# Altium PCB ATMEGA128转换座.PCBDOC
Units mm, origin at the board's own origin, x right, y up, seen from the top; angles counter-clockwise.
Board outline 152.4 x 101.6 mm, 2 copper layers (Top Layer, Bottom Layer); 5 components, 61 nets, 132 pads, 0 vias.
Unrouted connection lines stored in the file: 3.
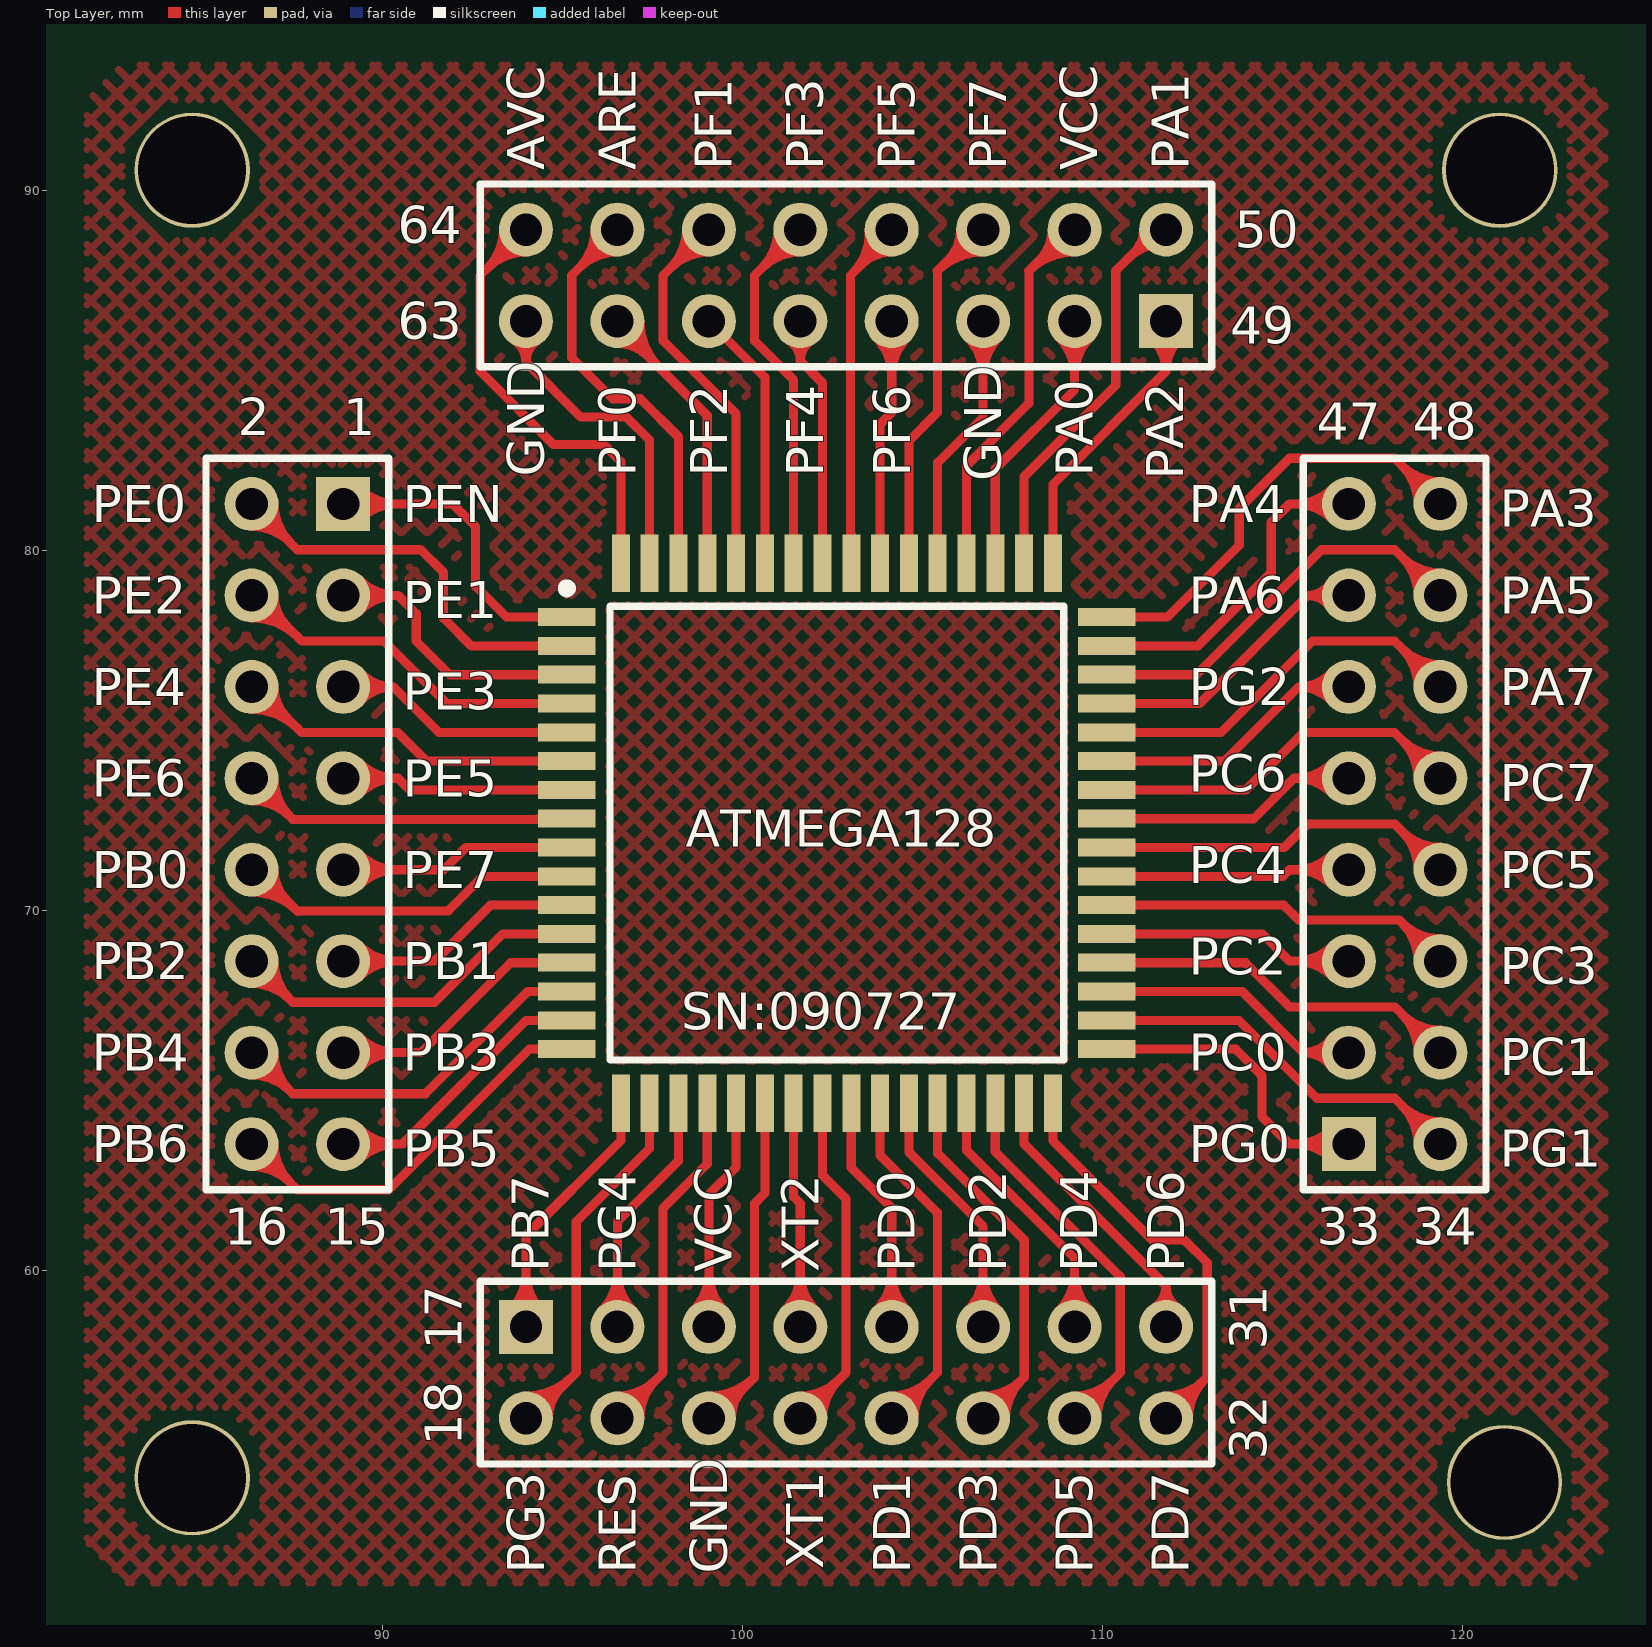
[diagram p0: Top Layer view]
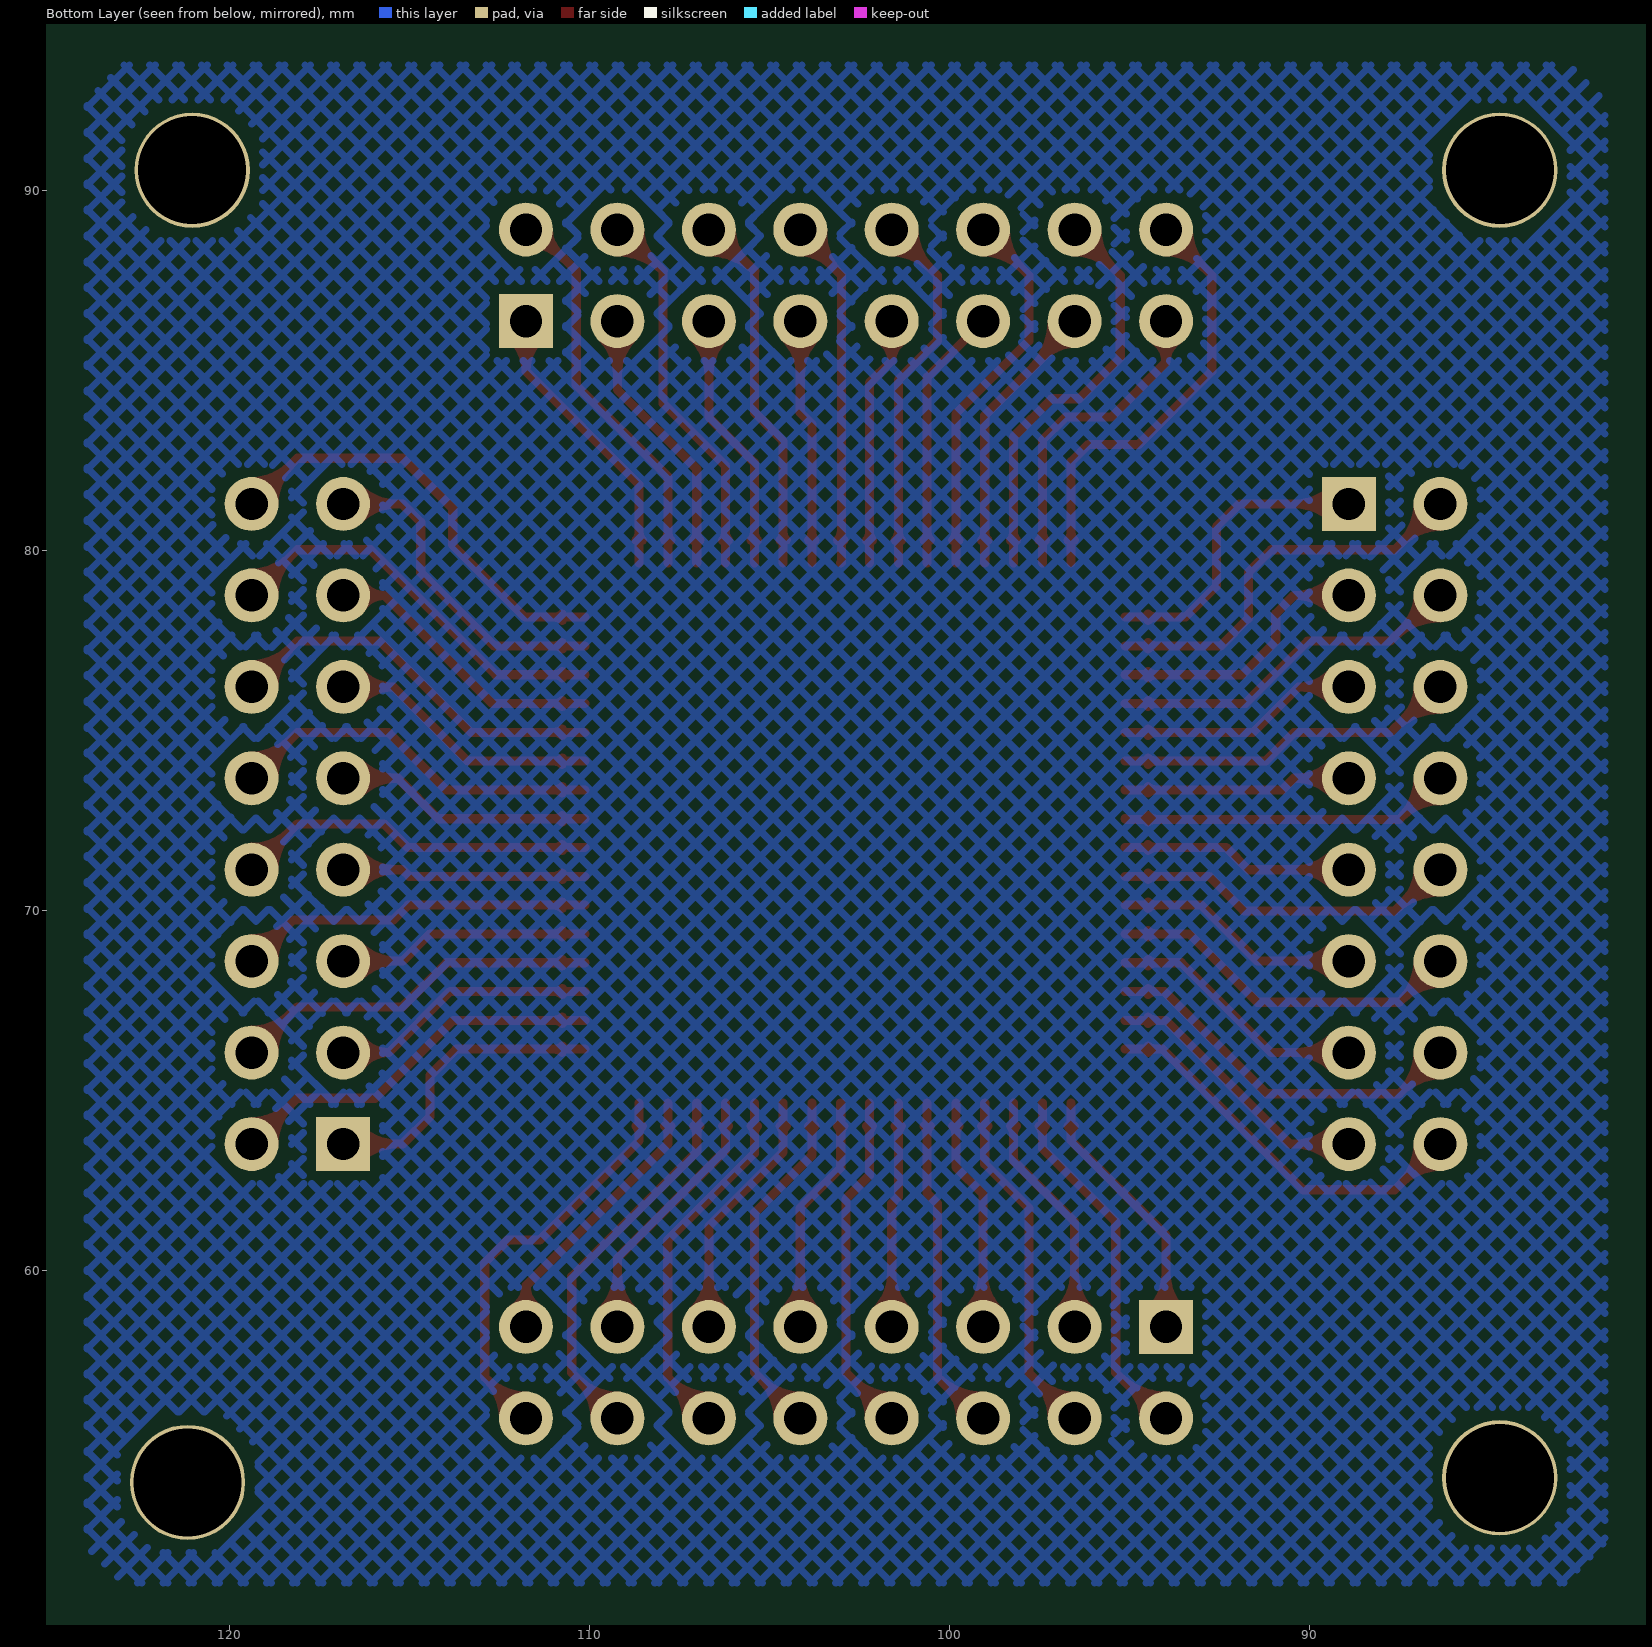
[diagram p1: Bottom Layer view, seen from below]

## Layer stack, top to bottom
Top Layer: signal copper 0.0356
Dielectric: dielectric 0.32, FR-4, Dk 4.8
Bottom Layer: signal copper 0.0356

## Board outline
25.4,25.4 177.8,25.4 177.8,127 25.4,127

## Design rules (kind name [scope] priority, off if disabled: settings)
Clearance [All] p1: gap=0.254
ComponentClearance [All] p1: gap=0.254 collisioncheckmode=3 verticalgap=0.254
PolygonConnect [All] p1: connectstyle=Relief reliefconductorwidth=0.254 reliefentries=4 polygonreliefangle="90 Angle"
RoutingVias [All] p1: holewidth=0.711 width=1.27 viastyle="Through Hole" minholewidth=0.711 minwidth=1.27 maxholewidth=0.711 maxwidth=1.27
SolderMaskExpansion [All] p1: expansion=0.102
TestPointUsage [All] p1: valid=0 allowmultiple=FALSE
Testpoint [All] p1: side=15 testpointundercomponent=TRUE minsize=1.016 maxsize=2.54 preferedsize=1.524 minholesize=0 maxholesize=1.016 preferedholesize=0.813 testpointgrid=0.025 style=1023 order=0123456789
Width [All] p1: maxlimit=0.254 minlimit=0.254 preferedwidth=0.254
17 further rules are at their usual default settings.

## Components (designator, comment, footprint, x,y, rotation, side; value= is the part's Value field where it differs from the comment)
ATMEGA128 "ATmega128-16AI" 64A 102.616,72.136 r0 top (schematic designator U1)
P1 "Header 8X2" HDR2X8 88.9,81.28 r270 top
P2 "Header 8X2" HDR2X8 93.98,58.42 r0 top
P3 "Header 8X2" HDR2X8 116.84,63.5 r90 top
P4 "Header 8X2" HDR2X8 111.76,86.36 r180 top

## Footprints (in the part's own frame and the unit in brackets; to place one, negate y for a bottom-side part, rotate by r counter-clockwise, add the part's x,y. Pads: shape width x height; smd on the part's side, far side on the other; paste and mask are expansions set on the pad)
64A [mm] "QFP; 64 Leads; Body 14 x 14 mm; Pitch 0.8 mm"
  rect 1.6x0.5 smd: 1(-7.5,6) 2(-7.5,5.2) 3(-7.5,4.4) 4(-7.5,3.6) 5(-7.5,2.8) 6(-7.5,2) 7(-7.5,1.2) 8(-7.5,0.4) 9(-7.5,-0.4) 10(-7.5,-1.2) 11(-7.5,-2) 12(-7.5,-2.8) 13(-7.5,-3.6) 14(-7.5,-4.4) 15(-7.5,-5.2) 16(-7.5,-6) 33(7.5,-6) 34(7.5,-5.2) 35(7.5,-4.4) 36(7.5,-3.6) 37(7.5,-2.8) 38(7.5,-2) 39(7.5,-1.2) 40(7.5,-0.4) 41(7.5,0.4) 42(7.5,1.2) 43(7.5,2) 44(7.5,2.8) 45(7.5,3.6) 46(7.5,4.4) 47(7.5,5.2) 48(7.5,6)
  rect 0.5x1.6 smd: 17(-6,-7.5) 18(-5.2,-7.5) 19(-4.4,-7.5) 20(-3.6,-7.5) 21(-2.8,-7.5) 22(-2,-7.5) 23(-1.2,-7.5) 24(-0.4,-7.5) 25(0.4,-7.5) 26(1.2,-7.5) 27(2,-7.5) 28(2.8,-7.5) 29(3.6,-7.5) 30(4.4,-7.5) 31(5.2,-7.5) 32(6,-7.5) 49(6,7.5) 50(5.2,7.5) 51(4.4,7.5) 52(3.6,7.5) 53(2.8,7.5) 54(2,7.5) 55(1.2,7.5) 56(0.4,7.5) 57(-0.4,7.5) 58(-1.2,7.5) 59(-2,7.5) 60(-2.8,7.5) 61(-3.6,7.5) 62(-4.4,7.5) 63(-5.2,7.5) 64(-6,7.5)
  silkscreen extent -7.62,-6.3 6.3,6.92
HDR2X8 [mm] "Connector; Header; 8x2 Position"
  rect 1.5x1.5 hole 0.9: 1(0,0)
  round 1.5 hole 0.9: 2(0,-2.54) 3(2.54,0) 4(2.54,-2.54) 5(5.08,0) 6(5.08,-2.54) 7(7.62,0) 8(7.62,-2.54) 9(10.16,0) 10(10.16,-2.54) 11(12.7,0) 12(12.7,-2.54) 13(15.24,0) 14(15.24,-2.54) 15(17.78,0) 16(17.78,-2.54)
  silkscreen extent -1.27,-3.81 19.05,1.27

## Part data
ATMEGA128: "8-Bit AVR Microcontroller with 128K Bytes of In-System Programmable Flash Memory"
P1 P2 P3 P4: "Header, 8-Pin, Dual row"

## Free pads (board coordinates)
  round 3.2 hole 3: 0(84.709,90.551) 1(121.031,90.551) 2(121.158,54.102) 3(84.709,54.229)

## Nets (pads, with @x,y where several pads share a name; then routed paths per layer and width w, separated by ;. In a path a pad name is that pad's centre, name@x,y a point inside that pad or via, vN(x,y) a via of type N, cw(c..) or ccw(c..) an arc to the next point about the centre after c; other vN are vias at no path point)
AREF: ATMEGA128.62 P4.14 | length 15.7
  Top Layer w0.254: P4.14@95.897,88.9 cw(c94.393,88.9) 95.456,87.836 cw(c96.52,86.773) P4.14@96.52,88.277 ; P4.14@96.151,88.9 cw(c95.26,88.9) 95.89,88.27 cw(c96.52,87.64) P4.14@96.52,88.531 ; P4.14 95.25,87.63 95.25,85.344 96.393,84.201 97.155,84.201 98.216,83.14 ATMEGA128.62 ; ATMEGA128.62@98.129,80.273 ccw(c97.919,80.483) 98.216,80.483 ccw(c98.513,80.483) ATMEGA128.62@98.303,80.273
AVCC: ATMEGA128.64 P4.16 | length 16.5
  Top Layer w0.254: P4.16@93.357,88.9 cw(c91.853,88.9) 92.916,87.836 cw(c93.98,86.773) P4.16@93.98,88.277 ; P4.16@93.611,88.9 cw(c92.72,88.9) 93.35,88.27 cw(c93.98,87.64) P4.16@93.98,88.531 ; P4.16 92.71,87.63 92.71,84.963 94.742,82.931 96.139,82.931 96.616,82.454 ATMEGA128.64 ; ATMEGA128.64@96.529,80.273 ccw(c96.319,80.483) 96.616,80.483 ccw(c96.913,80.483) ATMEGA128.64@96.703,80.273
GND: ATMEGA128.22 ATMEGA128.53 ATMEGA128.63 P2.6 P4.5 P4.15 | length 35.5
  Top Layer w0.254: P4.15@93.642,85.836 cw(c93.243,85.217) 93.98,85.217 ; P4.15 93.98,85.217 ; P4.15@94.318,85.836 ccw(c94.717,85.217) 93.98,85.217 ; ATMEGA128.63@97.329,80.273 ccw(c97.119,80.483) 97.416,80.483 ccw(c97.713,80.483) ATMEGA128.63@97.503,80.273 ; ATMEGA128.63 97.416,83.051 96.774,83.693 95.504,83.693 93.98,85.217 ; P2.6 99.187,55.88 100.33,57.023 ; P2.6@99.062,56.249 ccw(c99.069,57.424) 99.9,56.593 ; P2.6@99.064,56.503 ccw(c99.075,58.278) 100.33,57.023 ; P2.6@99.683,55.88 cw(c100.88,55.88) 100.034,56.727 ; ATMEGA128.22@100.529,63.999 cw(c100.319,63.789) 100.616,63.789 cw(c100.913,63.789) ATMEGA128.22@100.703,63.999 ; ATMEGA128.22 100.616,62.135 100.33,61.849 100.33,57.023 ; ATMEGA128.53@105.329,80.273 ccw(c105.119,80.483) 105.416,80.483 ccw(c105.713,80.483) ATMEGA128.53@105.503,80.273 ; ATMEGA128.53 105.416,82.429 106.68,83.693 P4.5 ; P4.5@106.239,85.919 cw(c105.176,84.856) 106.68,84.856 cw(c108.184,84.856) P4.5@107.121,85.919 ; P4.5@106.419,86.099 cw(c105.789,85.469) 106.68,85.469 cw(c107.571,85.469) P4.5@106.941,86.099
PA0: ATMEGA128.51 P4.3 | length 11.9
  Top Layer w0.254: ATMEGA128.51@106.929,80.273 ccw(c106.719,80.483) 107.016,80.483 ccw(c107.313,80.483) ATMEGA128.51@107.103,80.273 ; ATMEGA128.51 107.016,82.251 109.22,84.455 P4.3 ; P4.3@108.779,85.919 cw(c107.716,84.856) 109.22,84.856 cw(c110.724,84.856) P4.3@109.661,85.919 ; P4.3@108.959,86.099 cw(c108.329,85.469) 109.22,85.469 cw(c110.111,85.469) P4.3@109.481,86.099
PA1: ATMEGA128.50 P4.2 | length 13.4
  Top Layer w0.254: ATMEGA128.50@107.729,80.273 ccw(c107.519,80.483) 107.816,80.483 ccw(c108.113,80.483) ATMEGA128.50@107.903,80.273 ; ATMEGA128.50 107.816,82.035 110.363,84.582 110.363,87.757 111.506,88.9 P4.2 ; 110.696,88.09 cw(c111.76,87.027) P4.2@111.76,88.531 ; 110.876,88.27 ccw(c110.246,88.9) P4.2@111.137,88.9
PA2: ATMEGA128.49 P4.1 | length 11.8
  Top Layer w0.254: ATMEGA128.49@108.529,80.273 ccw(c108.319,80.483) 108.616,80.483 ccw(c108.913,80.483) ATMEGA128.49@108.703,80.273 ; ATMEGA128.49 108.616,81.819 111.76,84.963 ; P4.1@111.344,85.896 cw(c110.505,84.963) 111.76,84.963 ; P4.1@111.513,86.085 cw(c111.017,85.533) 111.76,85.533 cw(c112.503,85.533) P4.1@112.007,86.085 ; P4.1 111.76,84.963 ; P4.1@112.176,85.896 ccw(c113.015,84.963) 111.76,84.963
PA3: ATMEGA128.48 P3.16 | length 16.4
  Top Layer w0.254: ATMEGA128.48 111.791,78.136 113.792,80.137 113.792,81.153 115.189,82.55 118.11,82.55 P3.16 ; ATMEGA128.48@110.753,78.049 cw(c110.963,77.839) 110.963,78.136 cw(c110.963,78.433) ATMEGA128.48@110.753,78.223 ; P3.16@118.757,81.28 ccw(c117.253,81.28) 118.316,82.344 ccw(c119.38,83.407) P3.16@119.38,81.903 ; P3.16@119.011,81.28 ccw(c118.12,81.28) 118.75,81.91 ccw(c119.38,82.54) P3.16@119.38,81.649
PA4: ATMEGA128.47 P3.15 | length 13.4
  Top Layer w0.254: ATMEGA128.47 112.642,77.336 114.681,79.375 114.681,80.772 115.189,81.28 P3.15 ; ATMEGA128.47@110.753,77.249 cw(c110.963,77.039) 110.963,77.336 cw(c110.963,77.633) ATMEGA128.47@110.753,77.423 ; P3.15@116.399,80.839 ccw(c115.336,79.776) 115.336,81.28 ccw(c115.336,82.784) P3.15@116.399,81.721 ; P3.15@116.579,81.019 ccw(c115.949,80.389) 115.949,81.28 ccw(c115.949,82.171) P3.15@116.579,81.541
PA5: ATMEGA128.46 P3.14 | length 15.5
  Top Layer w0.254: ATMEGA128.46 112.604,76.536 116.078,80.01 118.11,80.01 P3.14 ; ATMEGA128.46@110.753,76.449 cw(c110.963,76.239) 110.963,76.536 cw(c110.963,76.833) ATMEGA128.46@110.753,76.623 ; P3.14@118.757,78.74 ccw(c117.253,78.74) 118.316,79.804 ccw(c119.38,80.867) P3.14@119.38,79.363 ; P3.14@119.011,78.74 ccw(c118.12,78.74) 118.75,79.37 ccw(c119.38,80) P3.14@119.38,79.109
PA6: ATMEGA128.45 P3.13 | length 9.9
  Top Layer w0.254: ATMEGA128.45 112.693,75.736 115.697,78.74 ; ATMEGA128.45@110.753,75.649 cw(c110.963,75.439) 110.963,75.736 cw(c110.963,76.033) ATMEGA128.45@110.753,75.823 ; P3.13@116.316,78.402 ccw(c115.697,78.003) 115.697,78.74 ; P3.13@116.316,79.078 cw(c115.697,79.477) 115.697,78.74 ; P3.13 115.697,78.74
PA7: ATMEGA128.44 P3.12 | length 15.1
  Top Layer w0.254: ATMEGA128.44 113.29,74.936 115.824,77.47 118.11,77.47 P3.12 ; ATMEGA128.44@110.753,74.849 cw(c110.963,74.639) 110.963,74.936 cw(c110.963,75.233) ATMEGA128.44@110.753,75.023 ; P3.12@118.757,76.2 ccw(c117.253,76.2) 118.316,77.264 ccw(c119.38,78.327) P3.12@119.38,76.823 ; P3.12@119.011,76.2 ccw(c118.12,76.2) 118.75,76.83 ccw(c119.38,77.46) P3.12@119.38,76.569
PB0: ATMEGA128.10 P1.10 | length 13.4
  Top Layer w0.254: P1.10@86.36,70.497 cw(c86.36,68.686) 87.64,69.967 ; P1.10@86.36,70.751 cw(c86.36,69.554) 87.207,70.4 ; P1.10 86.487,71.12 87.63,69.977 91.821,69.977 92.78,70.936 ATMEGA128.10 ; P1.10@86.983,71.12 ccw(c88.18,71.12) 87.334,70.273 ; ATMEGA128.10@94.479,70.849 ccw(c94.269,70.639) 94.269,70.936 ccw(c94.269,71.233) ATMEGA128.10@94.479,71.023
PB1: ATMEGA128.11 P1.11 | length 11.1
  Top Layer w0.254: P1.11 91.44,68.58 92.996,70.136 ATMEGA128.11 ; P1.11@89.161,68.319 cw(c89.791,67.689) 89.791,68.58 cw(c89.791,69.471) P1.11@89.161,68.841 ; P1.11@89.341,68.139 cw(c90.404,67.076) 90.404,68.58 cw(c90.404,70.084) P1.11@89.341,69.021 ; ATMEGA128.11@94.479,70.049 ccw(c94.269,69.839) 94.269,70.136 ccw(c94.269,70.433) ATMEGA128.11@94.479,70.223
PB2: ATMEGA128.12 P1.12 | length 14.2
  Top Layer w0.254: P1.12@86.36,67.957 cw(c86.36,66.453) 87.424,67.516 cw(c88.487,68.58) P1.12@86.983,68.58 ; P1.12@86.36,68.211 cw(c86.36,67.32) 86.99,67.95 cw(c87.62,68.58) P1.12@86.729,68.58 ; P1.12 87.503,67.437 91.44,67.437 93.339,69.336 ATMEGA128.12 ; ATMEGA128.12@94.479,69.249 ccw(c94.269,69.039) 94.269,69.336 ccw(c94.269,69.633) ATMEGA128.12@94.479,69.423
PB3: ATMEGA128.13 P1.13 | length 11.5
  Top Layer w0.254: P1.13 91.059,66.04 93.555,68.536 ATMEGA128.13 ; P1.13@89.161,65.779 cw(c89.791,65.149) 89.791,66.04 cw(c89.791,66.931) P1.13@89.161,66.301 ; P1.13@89.341,65.599 cw(c90.404,64.536) 90.404,66.04 cw(c90.404,67.544) P1.13@89.341,66.481 ; ATMEGA128.13@94.479,68.449 ccw(c94.269,68.239) 94.269,68.536 ccw(c94.269,68.833) ATMEGA128.13@94.479,68.623
PB4: ATMEGA128.14 P1.14 | length 14.6
  Top Layer w0.254: P1.14@86.36,65.417 cw(c86.36,63.913) 87.424,64.976 cw(c88.487,66.04) P1.14@86.983,66.04 ; P1.14@86.36,65.671 cw(c86.36,64.78) 86.99,65.41 cw(c87.62,66.04) P1.14@86.729,66.04 ; P1.14 87.503,64.897 91.186,64.897 94.025,67.736 ATMEGA128.14 ; ATMEGA128.14@94.479,67.649 ccw(c94.269,67.439) 94.269,67.736 ccw(c94.269,68.033) ATMEGA128.14@94.479,67.823
PB5: ATMEGA128.15 P1.15 | length 11.9
  Top Layer w0.254: P1.15 90.551,63.5 93.987,66.936 ATMEGA128.15 ; P1.15@89.161,63.239 cw(c89.791,62.609) 89.791,63.5 cw(c89.791,64.391) P1.15@89.161,63.761 ; P1.15@89.341,63.059 cw(c90.404,61.996) 90.404,63.5 cw(c90.404,65.004) P1.15@89.341,63.941 ; ATMEGA128.15@94.479,66.849 ccw(c94.269,66.639) 94.269,66.936 ccw(c94.269,67.233) ATMEGA128.15@94.479,67.023
PB6: ATMEGA128.16 P1.16 | length 15.3
  Top Layer w0.254: P1.16@86.36,62.877 cw(c86.36,61.373) 87.424,62.436 cw(c88.487,63.5) P1.16@86.983,63.5 ; P1.16@86.36,63.131 cw(c86.36,62.24) 86.99,62.87 cw(c87.62,63.5) P1.16@86.729,63.5 ; P1.16@86.36,63.373 P1.16 87.63,62.23 90.17,62.23 94.076,66.136 ATMEGA128.16 ; ATMEGA128.16@94.479,66.049 ccw(c94.269,65.839) 94.269,66.136 ccw(c94.269,66.433) ATMEGA128.16@94.479,66.223
PB7: ATMEGA128.17 P2.1 | length 11.5
  Top Layer w0.254: P2.1@93.539,58.861 ccw(c92.476,59.924) 93.98,59.924 ccw(c95.484,59.924) P2.1@94.421,58.861 ; P2.1@93.719,58.681 ccw(c93.089,59.311) 93.98,59.311 ccw(c94.871,59.311) P2.1@94.241,58.681 ; P2.1 93.98,60.96 96.616,63.596 ATMEGA128.17 ; ATMEGA128.17@96.529,63.999 cw(c96.319,63.789) 96.616,63.789 cw(c96.913,63.789) ATMEGA128.17@96.703,63.999
PC0: ATMEGA128.35 P3.3 | length 10.7
  Top Layer w0.254: ATMEGA128.35 113.874,67.736 115.57,66.04 ; ATMEGA128.35@110.753,67.649 cw(c110.963,67.439) 110.963,67.736 cw(c110.963,68.033) ATMEGA128.35@110.753,67.823 ; P3.3@116.347,65.659 ccw(c115.57,65.057) 115.57,66.04 ; P3.3@116.347,66.421 cw(c115.57,67.023) 115.57,66.04 ; P3.3@116.548,65.814 ccw(c116.088,65.458) 116.088,66.04 ccw(c116.088,66.622) P3.3@116.548,66.266 ; P3.3 115.57,66.04
PC1: ATMEGA128.36 P3.4 | length 14.5
  Top Layer w0.254: ATMEGA128.36 113.963,68.536 115.189,67.31 118.11,67.31 P3.4 ; ATMEGA128.36@110.753,68.449 cw(c110.963,68.239) 110.963,68.536 cw(c110.963,68.833) ATMEGA128.36@110.753,68.623 ; P3.4@118.757,66.04 ccw(c117.253,66.04) 118.316,67.104 ccw(c119.38,68.167) P3.4@119.38,66.663 ; P3.4@119.011,66.04 ccw(c118.12,66.04) 118.75,66.67 ccw(c119.38,67.3) P3.4@119.38,66.409
PC2: ATMEGA128.37 P3.5 | length 11.3
  Top Layer w0.254: ATMEGA128.37 114.433,69.336 115.189,68.58 P3.5 ; ATMEGA128.37@110.753,69.249 cw(c110.963,69.039) 110.963,69.336 cw(c110.963,69.633) ATMEGA128.37@110.753,69.423 ; P3.5@116.399,68.139 ccw(c115.336,67.076) 115.336,68.58 ccw(c115.336,70.084) P3.5@116.399,69.021 ; P3.5@116.579,68.319 ccw(c115.949,67.689) 115.949,68.58 ccw(c115.949,69.471) P3.5@116.579,68.841
PC3: ATMEGA128.38 P3.6 | length 14.1
  Top Layer w0.254: ATMEGA128.38 115.03,70.136 115.443,69.723 118.237,69.723 P3.6 ; ATMEGA128.38@110.753,70.049 cw(c110.963,69.839) 110.963,70.136 cw(c110.963,70.433) ATMEGA128.38@110.753,70.223 ; P3.6@118.757,68.58 ccw(c117.253,68.58) 118.316,69.644 ccw(c119.38,70.707) P3.6@119.38,69.203 ; P3.6@119.011,68.58 ccw(c118.12,68.58) 118.75,69.21 ccw(c119.38,69.84) P3.6@119.38,68.949
PC4: ATMEGA128.39 P3.7 | length 11
  Top Layer w0.254: ATMEGA128.39 115.005,70.936 115.189,71.12 P3.7 ; ATMEGA128.39@110.753,70.849 cw(c110.963,70.639) 110.963,70.936 cw(c110.963,71.233) ATMEGA128.39@110.753,71.023 ; P3.7@116.399,70.679 ccw(c115.336,69.616) 115.336,71.12 ccw(c115.336,72.624) P3.7@116.399,71.561 ; P3.7@116.579,70.859 ccw(c115.949,70.229) 115.949,71.12 ccw(c115.949,72.011) P3.7@116.579,71.381
PC5: ATMEGA128.40 P3.8 | length 14.3
  Top Layer w0.254: ATMEGA128.40 115.043,71.736 115.697,72.39 118.11,72.39 P3.8 ; ATMEGA128.40@110.753,71.649 cw(c110.963,71.439) 110.963,71.736 cw(c110.963,72.033) ATMEGA128.40@110.753,71.823 ; P3.8@118.757,71.12 ccw(c117.253,71.12) 118.316,72.184 ccw(c119.38,73.247) P3.8@119.38,71.743 ; P3.8@119.011,71.12 ccw(c118.12,71.12) 118.75,71.75 ccw(c119.38,72.38) P3.8@119.38,71.489
PC6: ATMEGA128.41 P3.9 | length 11.4
  Top Layer w0.254: ATMEGA128.41 114.192,72.536 115.316,73.66 P3.9 ; ATMEGA128.41@110.753,72.449 cw(c110.963,72.239) 110.963,72.536 cw(c110.963,72.833) ATMEGA128.41@110.753,72.623 ; P3.9@116.399,73.219 ccw(c115.336,72.156) 115.336,73.66 ccw(c115.336,75.164) P3.9@116.399,74.101 ; P3.9@116.579,73.399 ccw(c115.949,72.769) 115.949,73.66 ccw(c115.949,74.551) P3.9@116.579,73.921
PC7: ATMEGA128.42 P3.10 | length 14.7
  Top Layer w0.254: ATMEGA128.42 113.976,73.336 115.57,74.93 118.11,74.93 P3.10 ; ATMEGA128.42@110.753,73.249 cw(c110.963,73.039) 110.963,73.336 cw(c110.963,73.633) ATMEGA128.42@110.753,73.423 ; P3.10@118.757,73.66 ccw(c117.253,73.66) 118.316,74.724 ccw(c119.38,75.787) P3.10@119.38,74.283 ; P3.10@119.011,73.66 ccw(c118.12,73.66) 118.75,74.29 ccw(c119.38,74.92) P3.10@119.38,74.029
PD0: ATMEGA128.25 P2.9 | length 10.9
  Top Layer w0.254: ATMEGA128.25@102.929,63.999 cw(c102.719,63.789) 103.016,63.789 cw(c103.313,63.789) ATMEGA128.25@103.103,63.999 ; ATMEGA128.25 103.016,62.846 104.14,61.722 P2.9 ; P2.9@103.699,58.861 ccw(c102.636,59.924) 104.14,59.924 ccw(c105.644,59.924) P2.9@104.581,58.861 ; P2.9@103.879,58.681 ccw(c103.249,59.311) 104.14,59.311 ccw(c105.031,59.311) P2.9@104.401,58.681
PD1: ATMEGA128.26 P2.10 | length 14.2
  Top Layer w0.254: ATMEGA128.26@103.729,63.999 cw(c103.519,63.789) 103.816,63.789 cw(c104.113,63.789) ATMEGA128.26@103.903,63.999 ; ATMEGA128.26 103.816,63.189 105.41,61.595 105.41,57.15 P2.10 ; P2.10@104.14,56.249 ccw(c104.14,57.14) 104.77,56.51 ccw(c105.4,55.88) P2.10@104.509,55.88 ; P2.10@104.14,56.503 ccw(c104.14,58.007) 105.204,56.944 ccw(c106.267,55.88) P2.10@104.763,55.88
PD2: ATMEGA128.27 P2.11 | length 11.3
  Top Layer w0.254: ATMEGA128.27@104.529,63.999 cw(c104.319,63.789) 104.616,63.789 cw(c104.913,63.789) ATMEGA128.27@104.703,63.999 ; ATMEGA128.27 104.616,63.278 106.68,61.214 P2.11 ; P2.11@106.239,58.861 ccw(c105.176,59.924) 106.68,59.924 ccw(c108.184,59.924) P2.11@107.121,58.861 ; P2.11@106.419,58.681 ccw(c105.789,59.311) 106.68,59.311 ccw(c107.571,59.311) P2.11@106.941,58.681
PD3: ATMEGA128.28 P2.12 | length 14.5
  Top Layer w0.254: ATMEGA128.28@105.329,63.999 cw(c105.119,63.789) 105.416,63.789 cw(c105.713,63.789) ATMEGA128.28@105.503,63.999 ; ATMEGA128.28 105.416,63.24 107.823,60.833 107.823,57.023 P2.12 ; P2.12@106.68,56.249 ccw(c106.68,57.14) 107.31,56.51 ccw(c107.94,55.88) P2.12@107.049,55.88 ; P2.12@106.68,56.503 ccw(c106.68,58.007) 107.744,56.944 ccw(c108.807,55.88) P2.12@107.303,55.88
PD4: ATMEGA128.29 P2.13 | length 11.7
  Top Layer w0.254: ATMEGA128.29@106.129,63.999 cw(c105.919,63.789) 106.216,63.789 cw(c106.513,63.789) ATMEGA128.29@106.303,63.999 ; ATMEGA128.29 106.216,63.329 109.22,60.325 P2.13 ; P2.13@108.779,58.861 ccw(c107.716,59.924) 109.22,59.924 ccw(c110.724,59.924) P2.13@109.661,58.861 ; P2.13@108.959,58.681 ccw(c108.329,59.311) 109.22,59.311 ccw(c110.111,59.311) P2.13@109.481,58.681
PD5: ATMEGA128.30 P2.14 | length 14.9
  Top Layer w0.254: ATMEGA128.30@106.929,63.999 cw(c106.719,63.789) 107.016,63.789 cw(c107.313,63.789) ATMEGA128.30@107.103,63.999 ; ATMEGA128.30 107.016,63.291 110.49,59.817 110.49,57.15 P2.14 ; P2.14@109.22,56.249 ccw(c109.22,57.14) 109.85,56.51 ccw(c110.48,55.88) P2.14@109.589,55.88 ; P2.14@109.22,56.503 ccw(c109.22,58.007) 110.284,56.944 ccw(c111.347,55.88) P2.14@109.843,55.88
PD6: ATMEGA128.31 P2.15 | length 9.8
  Top Layer w0.254: ATMEGA128.31@107.729,63.999 cw(c107.519,63.789) 107.816,63.789 cw(c108.113,63.789) ATMEGA128.31@107.903,63.999 ; ATMEGA128.31 107.816,63.507 111.76,59.563 ; P2.15@111.422,58.944 ccw(c111.023,59.563) 111.76,59.563 ; P2.15 111.76,59.563 ; P2.15@112.098,58.944 cw(c112.497,59.563) 111.76,59.563
PD7: ATMEGA128.32 P2.16 | length 15.8
  Top Layer w0.254: ATMEGA128.32@108.529,63.999 cw(c108.319,63.789) 108.616,63.789 cw(c108.913,63.789) ATMEGA128.32@108.703,63.999 ; ATMEGA128.32 108.616,63.596 111.379,60.833 112.268,60.833 112.903,60.198 112.903,57.023 P2.16 ; P2.16@111.76,56.249 ccw(c111.76,57.14) 112.39,56.51 ccw(c113.02,55.88) P2.16@112.129,55.88 ; P2.16@111.76,56.503 ccw(c111.76,58.007) 112.824,56.944 ccw(c113.887,55.88) P2.16@112.383,55.88
PE0: ATMEGA128.2 P1.2 | length 15.4
  Top Layer w0.254: P1.2@86.36,80.657 cw(c86.36,79.153) 87.424,80.216 cw(c88.487,81.28) P1.2@86.983,81.28 ; P1.2@86.36,80.911 cw(c86.36,80.02) 86.99,80.65 cw(c87.62,81.28) P1.2@86.729,81.28 ; P1.2 87.63,80.01 91.059,80.01 91.694,79.375 91.694,78.105 92.463,77.336 ATMEGA128.2 ; ATMEGA128.2@94.479,77.249 ccw(c94.269,77.039) 94.269,77.336 ccw(c94.269,77.633) ATMEGA128.2@94.479,77.423
PE1: ATMEGA128.3 P1.3 | length 11.8
  Top Layer w0.254: P1.3 90.424,78.74 90.932,78.232 90.932,77.47 91.866,76.536 ATMEGA128.3 ; P1.3@89.161,78.479 cw(c89.791,77.849) 89.791,78.74 cw(c89.791,79.631) P1.3@89.161,79.001 ; P1.3@89.341,78.299 cw(c90.404,77.236) 90.404,78.74 cw(c90.404,80.244) P1.3@89.341,79.181 ; ATMEGA128.3@94.479,76.449 ccw(c94.269,76.239) 94.269,76.536 ccw(c94.269,76.833) ATMEGA128.3@94.479,76.623
PE2: ATMEGA128.4 P1.4 | length 13.8
  Top Layer w0.254: P1.4@86.36,78.117 cw(c86.36,76.306) 87.64,77.587 ; P1.4@86.36,78.371 cw(c86.36,77.174) 87.207,78.02 ; P1.4 86.487,78.74 87.757,77.47 90.043,77.47 91.777,75.736 ATMEGA128.4 ; P1.4@86.983,78.74 ccw(c88.18,78.74) 87.334,77.893 ; ATMEGA128.4@94.479,75.649 ccw(c94.269,75.439) 94.269,75.736 ccw(c94.269,76.033) ATMEGA128.4@94.479,75.823
PE3: ATMEGA128.5 P1.5 | length 10.6
  Top Layer w0.254: P1.5 90.297,76.2 ; P1.5@89.175,75.953 cw(c89.727,75.457) 89.727,76.2 cw(c89.727,76.943) P1.5@89.175,76.447 ; P1.5@89.364,75.784 cw(c90.297,74.945) 90.297,76.2 ; P1.5@89.364,76.616 ccw(c90.297,77.455) 90.297,76.2 ; ATMEGA128.5@94.479,74.849 ccw(c94.269,74.639) 94.269,74.936 ccw(c94.269,75.233) ATMEGA128.5@94.479,75.023 ; ATMEGA128.5 91.561,74.936 90.297,76.2
PE4: ATMEGA128.6 P1.6 | length 13.4
  Top Layer w0.254: P1.6@86.36,75.577 cw(c86.36,73.766) 87.64,75.047 ; P1.6@86.36,75.831 cw(c86.36,74.634) 87.207,75.48 ; P1.6 86.487,76.2 87.757,74.93 90.424,74.93 91.218,74.136 ATMEGA128.6 ; P1.6@86.983,76.2 ccw(c88.18,76.2) 87.334,75.353 ; ATMEGA128.6@94.479,74.049 ccw(c94.269,73.839) 94.269,74.136 ccw(c94.269,74.433) ATMEGA128.6@94.479,74.223
PE5: ATMEGA128.7 P1.7 | length 10.6
  Top Layer w0.254: P1.7 90.424,73.66 90.748,73.336 ATMEGA128.7 ; P1.7@89.161,73.399 cw(c89.791,72.769) 89.791,73.66 cw(c89.791,74.551) P1.7@89.161,73.921 ; P1.7@89.341,73.219 cw(c90.404,72.156) 90.404,73.66 cw(c90.404,75.164) P1.7@89.341,74.101 ; ATMEGA128.7@94.479,73.249 ccw(c94.269,73.039) 94.269,73.336 ccw(c94.269,73.633) ATMEGA128.7@94.479,73.423
PE6: ATMEGA128.8 P1.8 | length 13.5
  Top Layer w0.254: P1.8@86.36,73.037 cw(c86.36,71.533) 87.424,72.596 cw(c88.487,73.66) P1.8@86.983,73.66 ; P1.8@86.36,73.291 cw(c86.36,72.4) 86.99,73.03 cw(c87.62,73.66) P1.8@86.729,73.66 ; P1.8 87.503,72.517 95.097,72.517 ATMEGA128.8 ; 94.223,72.517 ccw(c94.223,72.879) ATMEGA128.8@94.479,72.623 ; 94.315,72.517 cw(c94.315,72.285) ATMEGA128.8@94.479,72.449
PE7: ATMEGA128.9 P1.9 | length 10.7
  Top Layer w0.254: P1.9 91.694,71.12 92.31,71.736 ATMEGA128.9 ; P1.9@89.161,70.859 cw(c89.791,70.229) 89.791,71.12 cw(c89.791,72.011) P1.9@89.161,71.381 ; P1.9@89.341,70.679 cw(c90.404,69.616) 90.404,71.12 cw(c90.404,72.624) P1.9@89.341,71.561 ; ATMEGA128.9@94.479,71.649 ccw(c94.269,71.439) 94.269,71.736 ccw(c94.269,72.033) ATMEGA128.9@94.479,71.823
PEN: ATMEGA128.1 P1.1 | length 12.7
  Top Layer w0.254: P1.1 91.948,81.28 92.583,80.645 92.583,78.994 93.441,78.136 ATMEGA128.1 ; P1.1@89.161,81.019 cw(c89.791,80.389) 89.791,81.28 cw(c89.791,82.171) P1.1@89.161,81.541 ; P1.1@89.341,80.839 cw(c90.404,79.776) 90.404,81.28 cw(c90.404,82.784) P1.1@89.341,81.721 ; ATMEGA128.1@94.479,78.049 ccw(c94.269,77.839) 94.269,78.136 ccw(c94.269,78.433) ATMEGA128.1@94.479,78.223
PF0: ATMEGA128.61 P4.13 | length 11.5
  Top Layer w0.254: P4.13@96.52,85.737 cw(c96.52,84.54) 97.367,85.386 ; P4.13 96.52,86.233 99.016,83.737 ATMEGA128.61 ; P4.13@96.889,86.36 ccw(c98.086,86.36) 97.24,85.513 ; P4.13@97.143,86.36 ccw(c98.954,86.36) 97.673,85.08 ; ATMEGA128.61@98.929,80.273 ccw(c98.719,80.483) 99.016,80.483 ccw(c99.313,80.483) ATMEGA128.61@99.103,80.273
PF1: ATMEGA128.60 P4.12 | length 14.9
  Top Layer w0.254: P4.12@98.437,88.9 cw(c96.933,88.9) 97.996,87.836 cw(c99.06,86.773) P4.12@99.06,88.277 ; P4.12@98.691,88.9 cw(c97.8,88.9) 98.43,88.27 cw(c99.06,87.64) P4.12@99.06,88.531 ; P4.12 97.79,87.63 97.79,85.808 99.816,83.782 ATMEGA128.60 ; ATMEGA128.60@99.729,80.273 ccw(c99.519,80.483) 99.816,80.483 ccw(c100.113,80.483) ATMEGA128.60@99.903,80.273
PF2: ATMEGA128.59 P4.11 | length 7.8
  Top Layer w0.254: P4.11 100.616,84.804 ATMEGA128.59 ; ATMEGA128.59@100.529,80.273 ccw(c100.319,80.483) 100.616,80.483 ccw(c100.913,80.483) ATMEGA128.59@100.703,80.273
PF3: ATMEGA128.58 P4.10 | length 14.5
  Top Layer w0.254: P4.10@100.977,88.9 cw(c99.473,88.9) 100.536,87.836 cw(c101.6,86.773) P4.10@101.6,88.277 ; P4.10@101.231,88.9 cw(c100.34,88.9) 100.97,88.27 cw(c101.6,87.64) P4.10@101.6,88.531 ; ATMEGA128.58@101.329,80.273 ccw(c101.119,80.483) 101.416,80.483 ccw(c101.713,80.483) ATMEGA128.58@101.503,80.273 ; ATMEGA128.58 101.416,84.722 100.33,85.808 100.33,87.63 P4.10
PF4: ATMEGA128.57 P4.9 | length 8.8
  Top Layer w0.254: P4.9@101.278,85.826 cw(c100.935,85.257) 101.6,85.257 ; P4.9 101.6,85.257 ; P4.9@101.922,85.826 ccw(c102.265,85.257) 101.6,85.257 ; ATMEGA128.57@102.129,80.273 ccw(c101.919,80.483) 102.216,80.483 ccw(c102.513,80.483) ATMEGA128.57@102.303,80.273 ; ATMEGA128.57 102.216,84.641 101.6,85.257
PF5: ATMEGA128.56 P4.8 | length 13.3
  Top Layer w0.254: ATMEGA128.56@102.929,80.273 ccw(c102.765,80.437) 102.997,80.437 ; 102.997,80.529 ccw(c103.359,80.529) ATMEGA128.56@103.103,80.273 ; ATMEGA128.56 102.997,79.655 102.997,87.63 104.14,88.773 P4.8 ; 103.061,87.694 ccw(c101.953,88.801) P4.8@103.518,88.872 ; 103.293,87.926 cw(c104.14,87.08) P4.8@104.14,88.277 ; 103.468,88.101 ccw(c102.732,88.836) P4.8@103.771,88.883
PF6: ATMEGA128.55 P4.7 | length 11.1
  Top Layer w0.254: P4.7@103.699,85.919 cw(c102.636,84.856) 104.14,84.856 cw(c105.644,84.856) P4.7@104.581,85.919 ; ATMEGA128.55@103.729,80.273 ccw(c103.519,80.483) 103.816,80.483 ccw(c104.113,80.483) ATMEGA128.55@103.903,80.273 ; ATMEGA128.55 103.816,83.496 104.14,83.82 P4.7 ; P4.7@103.879,86.099 cw(c103.249,85.469) 104.14,85.469 cw(c105.031,85.469) P4.7@104.401,86.099
PF7: ATMEGA128.54 P4.6 | length 14
  Top Layer w0.254: ATMEGA128.54@104.529,80.273 ccw(c104.319,80.483) 104.616,80.483 ccw(c104.913,80.483) ATMEGA128.54@104.703,80.273 ; ATMEGA128.54 104.616,83.026 105.41,83.82 105.41,87.757 106.553,88.9 P4.6 ; 105.4,87.747 cw(c106.68,86.466) P4.6@106.68,88.277 ; 105.706,88.053 ccw(c104.86,88.9) P4.6@106.057,88.9 ; 105.833,88.18 cw(c106.68,87.334) P4.6@106.68,88.531
PG0: ATMEGA128.33 P3.1 | length 12.7
  Top Layer w0.254: ATMEGA128.33 113.696,66.136 114.427,65.405 114.427,64.262 115.189,63.5 P3.1 ; ATMEGA128.33@110.753,66.049 cw(c110.963,65.839) 110.963,66.136 cw(c110.963,66.433) ATMEGA128.33@110.753,66.223 ; P3.1@116.399,63.059 ccw(c115.336,61.996) 115.336,63.5 ccw(c115.336,65.004) P3.1@116.399,63.941 ; P3.1@116.579,63.239 ccw(c115.949,62.609) 115.949,63.5 ccw(c115.949,64.391) P3.1@116.579,63.761
PG1: ATMEGA128.34 P3.2 | length 14.9
  Top Layer w0.254: ATMEGA128.34 113.785,66.936 115.951,64.77 118.11,64.77 P3.2 ; ATMEGA128.34@110.753,66.849 cw(c110.963,66.639) 110.963,66.936 cw(c110.963,67.233) ATMEGA128.34@110.753,67.023 ; P3.2@118.757,63.5 ccw(c117.253,63.5) 118.316,64.564 ccw(c119.38,65.627) P3.2@119.38,64.123 ; P3.2@119.011,63.5 ccw(c118.12,63.5) 118.75,64.13 ccw(c119.38,64.76) P3.2@119.38,63.869
PG2: ATMEGA128.43 P3.11 | length 11.4
  Top Layer w0.254: ATMEGA128.43 113.379,74.136 115.443,76.2 ; ATMEGA128.43@110.753,74.049 cw(c110.963,73.839) 110.963,74.136 cw(c110.963,74.433) ATMEGA128.43@110.753,74.223 ; P3.11@116.376,75.784 ccw(c115.443,74.945) 115.443,76.2 ; P3.11@116.376,76.616 cw(c115.443,77.455) 115.443,76.2 ; P3.11@116.565,75.953 ccw(c116.013,75.457) 116.013,76.2 ccw(c116.013,76.943) P3.11@116.565,76.447 ; P3.11 115.443,76.2
PG3: ATMEGA128.18 P2.2 | length 14
  Top Layer w0.254: P2.2 94.107,55.88 95.377,57.15 95.377,61.341 97.416,63.38 ATMEGA128.18 ; P2.2@93.98,56.249 ccw(c93.98,57.446) 94.827,56.6 ; P2.2@93.98,56.503 ccw(c93.98,58.314) 95.26,57.033 ; P2.2@94.603,55.88 cw(c95.8,55.88) 94.954,56.727 ; ATMEGA128.18@97.329,63.999 cw(c97.119,63.789) 97.416,63.789 cw(c97.713,63.789) ATMEGA128.18@97.503,63.999
PG4: ATMEGA128.19 P2.3 | length 11.1
  Top Layer w0.254: P2.3@96.079,58.861 ccw(c95.016,59.924) 96.52,59.924 ccw(c98.024,59.924) P2.3@96.961,58.861 ; P2.3@96.259,58.681 ccw(c95.629,59.311) 96.52,59.311 ccw(c97.411,59.311) P2.3@96.781,58.681 ; P2.3 96.52,61.341 98.216,63.037 ATMEGA128.19 ; ATMEGA128.19@98.129,63.999 cw(c97.919,63.789) 98.216,63.789 cw(c98.513,63.789) ATMEGA128.19@98.303,63.999
RESET: ATMEGA128.20 P2.4 | length 14
  Top Layer w0.254: P2.4 97.79,57.15 97.79,61.722 99.016,62.948 ATMEGA128.20 ; P2.4@96.52,56.249 ccw(c96.52,57.14) 97.15,56.51 ccw(c97.78,55.88) P2.4@96.889,55.88 ; P2.4@96.52,56.503 ccw(c96.52,58.007) 97.584,56.944 ccw(c98.647,55.88) P2.4@97.143,55.88 ; ATMEGA128.20@98.929,63.999 cw(c98.719,63.789) 99.016,63.789 cw(c99.313,63.789) ATMEGA128.20@99.103,63.999
VCC: ATMEGA128.21 ATMEGA128.52 P2.5 P4.4 | length 25.1
  Top Layer w0.254: P2.5@98.619,58.861 ccw(c97.556,59.924) 99.06,59.924 ccw(c100.564,59.924) P2.5@99.501,58.861 ; P2.5@98.799,58.681 ccw(c98.169,59.311) 99.06,59.311 ccw(c99.951,59.311) P2.5@99.321,58.681 ; P2.5 99.06,62.103 99.816,62.859 ATMEGA128.21 ; ATMEGA128.21@99.729,63.999 cw(c99.519,63.789) 99.816,63.789 cw(c100.113,63.789) ATMEGA128.21@99.903,63.999 ; ATMEGA128.52@106.129,80.273 ccw(c105.919,80.483) 106.216,80.483 ccw(c106.513,80.483) ATMEGA128.52@106.303,80.273 ; ATMEGA128.52 106.216,82.34 107.95,84.074 107.95,87.757 109.093,88.9 P4.4 ; 107.94,87.747 cw(c109.22,86.466) P4.4@109.22,88.277 ; 108.246,88.053 ccw(c107.4,88.9) P4.4@108.597,88.9 ; 108.373,88.18 cw(c109.22,87.334) P4.4@109.22,88.531
XTAL1: ATMEGA128.24 P2.8 | length 13.8
  Top Layer w0.254: P2.8 102.87,57.15 102.87,61.976 102.216,62.63 ATMEGA128.24 ; P2.8@101.6,56.249 ccw(c101.6,57.14) 102.23,56.51 ccw(c102.86,55.88) P2.8@101.969,55.88 ; P2.8@101.6,56.503 ccw(c101.6,58.007) 102.664,56.944 ccw(c103.727,55.88) P2.8@102.223,55.88 ; ATMEGA128.24@102.129,63.999 cw(c101.919,63.789) 102.216,63.789 cw(c102.513,63.789) ATMEGA128.24@102.303,63.999
XTAL2: ATMEGA128.23 P2.7 | length 10.5
  Top Layer w0.254: P2.7@101.159,58.861 ccw(c100.096,59.924) 101.6,59.924 ccw(c103.104,59.924) P2.7@102.041,58.861 ; ATMEGA128.23@101.329,63.999 cw(c101.119,63.789) 101.416,63.789 cw(c101.713,63.789) ATMEGA128.23@101.503,63.999 ; P2.7@101.339,58.681 ccw(c100.709,59.311) 101.6,59.311 ccw(c102.491,59.311) P2.7@101.861,58.681 ; ATMEGA128.23 101.416,62.033 101.6,61.849 P2.7

## Polygon pours and split planes (outlines as drawn)
no net on Top Layer (hatched 45Degree grid 0.508 track 0.203): 81.788,92.456 82.804,93.472 122.936,93.472 123.952,92.456 123.952,52.324 122.936,51.308 82.931,51.308 81.788,52.451
no net on Bottom Layer (hatched 45Degree grid 0.508 track 0.203): 81.788,92.456 82.804,93.472 122.936,93.472 123.952,92.456 123.952,52.324 122.936,51.308 82.931,51.308 81.788,52.451

## Silkscreen, mask and mechanical layers (free items; w line width, h text height)
Top Overlay:
  text "AVC" at 94.488,90.551 h1.02 r90
  text "ARE" at 97.028,90.551 h1.02 r90
  text "PF1" at 99.695,90.551 h1.02 r90
  text "PF3" at 102.235,90.551 h1.02 r90
  text "PF5" at 104.775,90.551 h1.02 r90
  text "PF7" at 107.315,90.551 h1.02 r90
  text "VCC" at 109.855,90.551 h1.02 r90
  text "PA1" at 112.395,90.551 h1.02 r90
  text "64" at 90.424,88.519 h1.02
  text "50" at 113.665,88.392 h1.02
  text "63" at 90.424,85.852 h1.02
  text "49" at 113.538,85.725 h1.02
  text "2" at 85.979,83.185 h1.02
  text "1" at 88.9,83.185 h1.02
  text "47" at 115.951,83.058 h1.02
  text "48" at 118.618,83.058 h1.02
  text "GND" at 94.488,82.042 h1.02 r90
  text "PF0" at 97.028,82.042 h1.02 r90
  text "PF2" at 99.568,82.042 h1.02 r90
  text "PF4" at 102.235,82.042 h1.02 r90
  text "PF6" at 104.648,82.042 h1.02 r90
  text "PA0" at 109.728,82.042 h1.02 r90
  text "PA2" at 112.241,81.95 h1.02 r90
  text "GND" at 107.188,81.915 h1.02 r90
  text "PE0" at 81.915,80.772 h1.02
  text "PEN" at 90.551,80.772 h1.02
  text "PA4" at 112.395,80.772 h1.02
  text "PA3" at 121.031,80.645 h1.02
  text "PE2" at 81.915,78.232 h1.02
  text "PA6" at 112.395,78.232 h1.02
  text "PA5" at 121.031,78.232 h1.02
  text "PE1" at 90.551,78.105 h1.02
  text "PE4" at 81.915,75.692 h1.02
  text "PG2" at 112.395,75.692 h1.02
  text "PA7" at 121.031,75.692 h1.02
  text "PE3" at 90.551,75.565 h1.02
  text "PC6" at 112.395,73.279 h1.02
  text "PE6" at 81.915,73.152 h1.02
  text "PE5" at 90.551,73.152 h1.02
  text "PC7" at 121.031,73.025 h1.02
  text "PC4" at 112.395,70.739 h1.02
  text "PB0" at 81.915,70.612 h1.02
  text "PE7" at 90.551,70.612 h1.02
  text "PC5" at 121.031,70.612 h1.02
  text "PC2" at 112.395,68.199 h1.02
  text "PB2" at 81.915,68.072 h1.02
  text "PB1" at 90.551,68.072 h1.02
  text "PC3" at 121.031,67.945 h1.02
  text "SN:090727" at 98.298,66.675 h1.02
  text "PB4" at 81.915,65.532 h1.02
  text "PB3" at 90.551,65.532 h1.02
  text "PC0" at 112.395,65.532 h1.02
  text "PC1" at 121.031,65.405 h1.02
  text "PB6" at 81.915,62.992 h1.02
  text "PG0" at 112.395,62.992 h1.02
  text "PB5" at 90.551,62.865 h1.02
  text "PG1" at 121.031,62.865 h1.02
  text "16" at 85.598,60.706 h1.02
  text "15" at 88.392,60.706 h1.02
  text "33" at 115.951,60.706 h1.02
  text "34" at 118.618,60.706 h1.02
  text "PB7" at 94.615,59.944 h1.02 r90
  text "PG4" at 97.028,59.944 h1.02 r90
  text "VCC" at 99.695,59.944 h1.02 r90
  text "XT2" at 102.108,59.944 h1.02 r90
  text "PD0" at 104.775,59.944 h1.02 r90
  text "PD2" at 107.315,59.944 h1.02 r90
  text "PD4" at 109.855,59.944 h1.02 r90
  text "PD6" at 112.268,59.944 h1.02 r90
  text "17" at 92.202,57.785 h1.02 r90
  text "31" at 114.554,57.785 h1.02 r90
  text "18" at 92.202,55.118 h1.02 r90
  text "32" at 114.554,54.737 h1.02 r90
  text "XT1" at 102.235,51.689 h1.02 r90
  text "PG3" at 94.488,51.562 h1.02 r90
  text "RES" at 97.028,51.562 h1.02 r90
  text "GND" at 99.568,51.562 h1.02 r90
  text "PD1" at 104.648,51.562 h1.02 r90
  text "PD3" at 107.061,51.562 h1.02 r90
  text "PD5" at 109.728,51.562 h1.02 r90
  text "PD7" at 112.395,51.562 h1.02 r90
Mechanical 1:
  lines w0.254: 75.694,52.325 76.2,50.8 ; 75.75,92.244 76.26,93.768 ; 75.946,50.8 76.454,50.8 ; 76.006,93.768 76.514,93.767 ; 76.218,63.498 76.2,50.8 ; 76.242,81.07 76.26,93.768 ; 76.71,52.323 76.2,50.8 ; 76.766,92.243 76.26,93.768 ; 81.28,98.298 81.28,98.806 ; 82.804,98.044 81.28,98.552 ; 82.804,99.06 81.28,98.552 ; 94.783,98.552 81.28,98.552 ; 110.83,98.552 124.333,98.552 ; 122.809,98.044 124.333,98.552 ; 122.809,99.06 124.333,98.552 ; 124.333,98.298 124.333,98.806 ; 81.28,52.197 82.677,50.8 123.19,50.8 124.46,52.07 124.46,92.71 123.19,93.98 82.55,93.98 81.28,92.71 81.28,52.197
  text "43.053 (mm)" at 95.037,97.638 h1.52
  text "42.9677 (mm)" at 77.132,63.751 h1.52 r89.92